# Altium PCB GPS_Altimetro_BoosterPack.PcbDoc
Units mm, origin at the board's own origin, x right, y up, seen from the top; angles counter-clockwise.
Board outline 55 x 105 mm, 2 copper layers (Top Layer, Bottom Layer); 17 components, 23 nets, 107 pads, 4 vias.
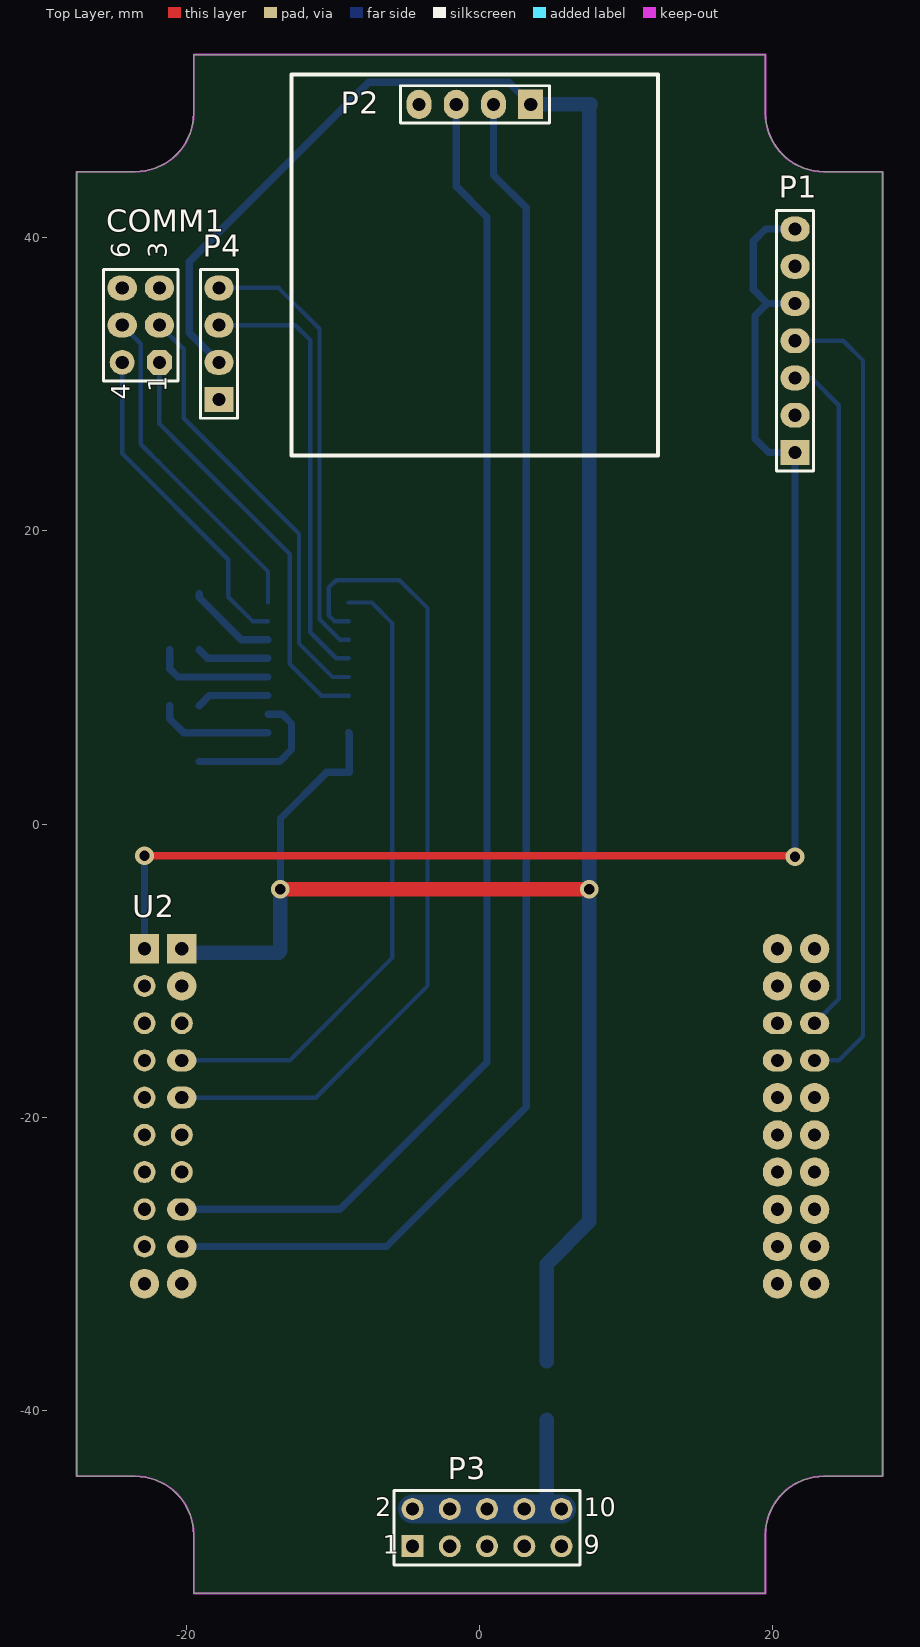
[diagram p0: Top Layer view]
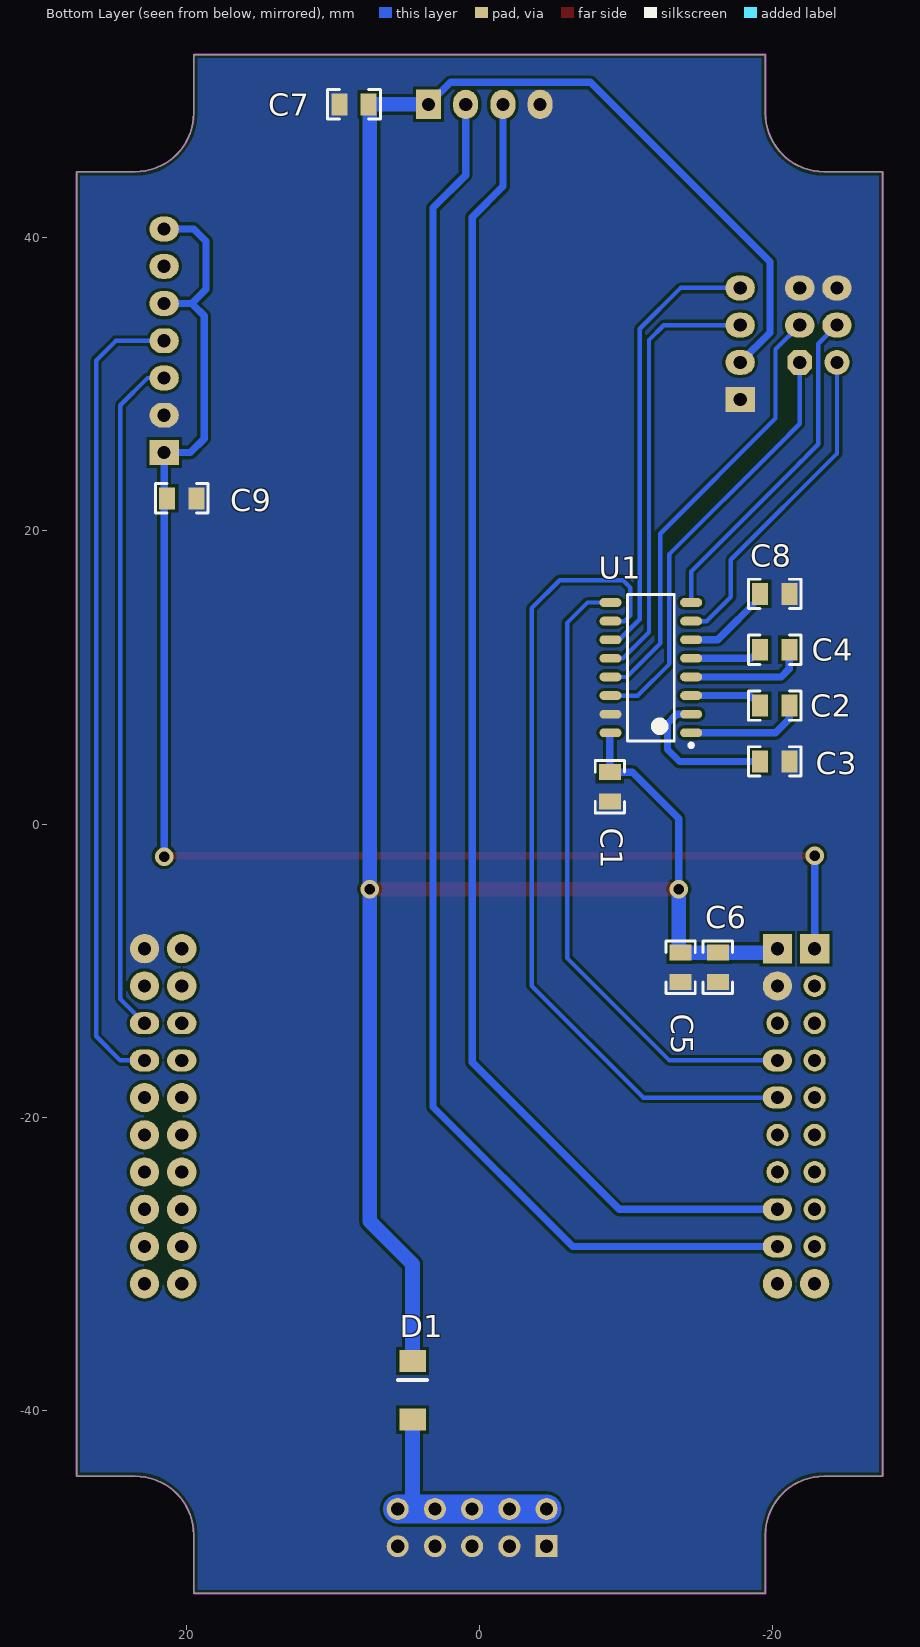
[diagram p1: Bottom Layer view, seen from below]

## Layer stack, top to bottom
Top Layer: signal copper 0.0356
Dielectric: dielectric 0.32, FR-4, Dk 4.8
Bottom Layer: signal copper 0.0356

## Board outline
-19.5,48.5 -19.561,47.805 -19.741,47.132 -20.036,46.5 -20.436,45.929 -20.929,45.436 -21.5,45.036 -22.132,44.741 -22.805,44.561 -23.5,44.5 -27.5,44.5 -27.5,-44.5 -23.5,-44.5 -22.805,-44.561 -22.132,-44.741 -21.5,-45.036 -20.929,-45.436 -20.436,-45.929 -20.036,-46.5 -19.741,-47.132 -19.561,-47.805 -19.5,-48.5 -19.5,-52.5 19.5,-52.5 19.5,-48.5 19.561,-47.805 19.741,-47.132 20.036,-46.5 20.436,-45.929 20.929,-45.436 21.5,-45.036 22.132,-44.741 22.805,-44.561 23.5,-44.5 27.5,-44.5 27.5,44.5 23.5,44.5 22.805,44.561 22.132,44.741 21.5,45.036 20.929,45.436 20.436,45.929 20.036,46.5 19.741,47.132 19.561,47.805 19.5,48.5 19.5,52.5 -19.5,52.5

## Design rules (kind name [scope] priority, off if disabled: settings)
Clearance [All] p1: gap=0.2
PolygonConnect [All] p1: connectstyle=Direct reliefconductorwidth=0.254 reliefentries=4 polygonreliefangle="90 Angle"
RoutingVias [All] p1: holewidth=0.8 width=2 viastyle="Through Hole" minholewidth=0.711 minwidth=1.27 maxholewidth=2 maxwidth=3
SilkscreenOverComponentPads [All] p1: minsilkscreentomaskgap=0.254
SolderMaskExpansion [All] p1: expansion=0.102
Width [All] p1: maxlimit=3 minlimit=0.3 preferedwidth=0.5
27 further rules are at their usual default settings.

## Components (designator, comment, footprint, x,y, rotation, side; value= is the part's Value field where it differs from the comment)
C1 "Capacitor" 0805_CAP -8.89,2.54 r90 bottom
C2 "Capacitor" 0805_CAP -20.134,8.079 r0 bottom
C3 "Capacitor" 0805_CAP -20.134,4.269 r0 bottom
C4 "Capacitor" 0805_CAP -20.134,11.889 r180 bottom
C5 "Capacitor" 0805_CAP -13.716,-9.779 r270 bottom
C6 "Capacitor" 0805_CAP -16.256,-9.779 r270 bottom
C7 "Capacitor" 0805_CAP 8.568,49.1 r0 bottom
C8 "Capacitor" 0805_CAP -20.134,15.699 r0 bottom
C9 "Capacitor" 0805_CAP 20.32,22.225 r180 bottom
COMM1 "AP_COMM" HDR2X3_CEN -21.844,31.496 r90 top
D1 "1N4148" 1N4148SMD 4.572,-40.64 r90 bottom
P1 "Header 7" HDR1X7 21.522,25.351 r90 top
P2 "Header 4" HDR1X4 3.488,49.1 r180 top
P3 "Header 5X2" HDR2X5 -4.572,-49.276 r0 top
P4 "Header 4" HDR1X4 -17.78,28.956 r90 top
U1 "MAX3232ESE" SOIC127P602-16BN -11.684,10.668 r0 bottom
U2 "Stellaris LaunchPad Board" LAUNCHPAD 0,-19.939 r0 top

## Footprints (in the part's own frame and the unit in brackets; to place one, negate y for a bottom-side part, rotate by r counter-clockwise, add the part's x,y. Pads: shape width x height; smd on the part's side, far side on the other; paste and mask are expansions set on the pad)
1N4148SMD [mm]
  rect 1.5x1.8 smd: 1(0,0) 2(4,0)
  silkscreen extent 2.7,-1 2.7,1
0805_CAP [mm]
  rect 1.1x1.5 smd: 1(-1,0) 2(1,0)
  silkscreen extent -1.8,-1 1.8,1, body extent -1,-0.62 1,0.63, height 0.78
HDR1X4 [mm] "Connector; Header; 4 Position"
  rect 1.7x2 hole 0.9: 1(0,0)
  oval 1.7x2 hole 0.9: 2(2.54,0) 3(5.08,0) 4(7.62,0)
  silkscreen extent -1.27,-1.27 8.89,1.27
HDR1X7 [mm] "Connector; Header; 7 Position"
  rect 1.7x2 hole 0.9: 1(0,0)
  oval 1.7x2 hole 0.9: 2(2.54,0) 3(5.08,0) 4(7.62,0) 5(10.16,0) 6(12.7,0) 7(15.24,0)
  silkscreen extent -1.27,-1.27 16.51,1.27
HDR2X3_CEN [mm] "Connector; Header; 3x2 Position"
  oct 1.7x1.7 hole 0.9: 1(0,0)
  oval 1.7x2 hole 0.9: 2(2.54,0) 3(5.08,0) 5(2.54,2.54) 6(5.08,2.54)
  round 1.7 hole 0.9: 4(0,2.54)
  silkscreen extent -1.27,-1.27 6.35,3.81, body extent -1.27,-1.27 6.33,3.81, height 8.55
HDR2X5 [mm] "Connector; Header; 5x2 Position"
  rect 1.5x1.5 hole 0.9: 1(0,0)
  round 1.5 hole 0.9: 2(0,2.54) 3(2.54,0) 4(2.54,2.54) 5(5.08,0) 6(5.08,2.54) 7(7.62,0) 8(7.62,2.54) 9(10.16,0) 10(10.16,2.54)
  silkscreen extent -1.27,-1.27 11.43,3.81
LAUNCHPAD [mm]
  rect 2x2 hole 0.9: 1(-22.86,11.43) 21(-20.32,11.43)
  round 1.5 hole 0.9: 2(-22.86,8.89) 3(-22.86,6.35) 4(-22.86,3.81) 5(-22.86,1.27) 6(-22.86,-1.27) 7(-22.86,-3.81) 8(-22.86,-6.35) 9(-22.86,-8.89) 23(-20.32,6.35) 26(-20.32,-1.27) 27(-20.32,-3.81)
  round 2 hole 0.9: 10(-22.86,-11.43) 11(22.86,11.43) 12(22.86,8.89) 15(22.86,1.27) 16(22.86,-1.27) 17(22.86,-3.81) 18(22.86,-6.35) 19(22.86,-8.89) 20(22.86,-11.43) 22(-20.32,8.89) 30(-20.32,-11.43) 31(20.32,11.43) 32(20.32,8.89) 35(20.32,1.27) 36(20.32,-1.27) 37(20.32,-3.81) 38(20.32,-6.35) 39(20.32,-8.89) 40(20.32,-11.43)
  oval 2x1.5 hole 0.9: 13(22.86,6.35) 14(22.86,3.81) 24(-20.32,3.81) 25(-20.32,1.27) 28(-20.32,-6.35) 29(-20.32,-8.89) 33(20.32,6.35) 34(20.32,3.81)
SOIC127P602-16BN [mm] "SOIC, 16-Leads, Body 9.9x3.9mm, Pitch 1.27mm, IPC Medium Density"
  oval 1.5x0.6 smd: 1(-2.75,4.445) 2(-2.75,3.175) 3(-2.75,1.905) 4(-2.75,0.635) 5(-2.75,-0.635) 6(-2.75,-1.905) 7(-2.75,-3.175) 8(-2.75,-4.445) 9(2.75,-4.445) 10(2.75,-3.175) 11(2.75,-1.905) 12(2.75,-0.635) 13(2.75,0.635) 14(2.75,1.905) 15(2.75,3.175) 16(2.75,4.445)
  silkscreen extent -2.87,-5 1.6,5.42, body extent -3,-5.1 3,5.1, height 1.7

## Part data
C1 C2 C3 C4 C5 C6 C7 C8 C9: library part Cap
COMM1: "Header, 3-Pin, Dual row"
P1: "Header, 7-Pin"
P2 P4: "Header, 4-Pin"
P3: "Header, 5-Pin, Dual row"
U1: library part MAX3232ESE+
U2: "Stellaris LaunchPad board"

## Via types
v1: diameter 1.27, hole 0.711, Top Layer to Bottom Layer, 4 vias

## Nets (pads, with @x,y where several pads share a name; then routed paths per layer and width w, separated by ;. In a path a pad name is that pad's centre, name@x,y a point inside that pad or via, vN(x,y) a via of type N, cw(c..) or ccw(c..) an arc to the next point about the centre after c; other vN are vias at no path point)
3.3V: C9.1 P1.1 P1.5 P1.7 U2.1 | length 100.8
  Top Layer w0.5: v1(-22.86,-2.159) 21.454,-2.159 v1(21.522,-2.227)
  Bottom Layer w0.5: U2.1 v1(-22.86,-2.159) ; P1.1@21.463,25.292 P1.1 ; v1(21.522,-2.227) P1.1 ; P1.5 19.636,35.511 ; P1.7 19.509,40.591 18.669,39.751 18.669,36.478 19.636,35.511 ; 19.636,35.511 18.796,34.671 18.796,26.289 19.734,25.351 P1.1
5V: C1.2 C5.1 C6.1 C7.1 D1.2 P2.1 P4.2 U1.16 U2.21 | length 176.1
  Top Layer w1: v1(-13.589,-4.445) v1(7.493,-4.445)
  Bottom Layer w0.5: P4.2 -19.812,33.528 -19.812,38.354 -7.566,50.6 1.988,50.6 P2.1 ; v1(-13.589,-4.445) -13.589,-2.286 ; -13.589,-1.27 -13.589,-2.286 ; U1.16 -8.89,6.179 C1.2 -10.43,3.54 -13.589,0.381 -13.589,-2.286
  Bottom Layer w1: U2.21 -20.05,-8.779 C6.1 C5.1 -13.589,-8.652 v1(-13.589,-4.445) ; P2.1 C7.1 7.493,49.025 7.493,-1.143 ; D1.2 4.572,-30.036 7.493,-27.115 v1(7.493,-4.445) 7.493,-1.143 ; 7.493,-2.794 7.493,-1.143
ALT_SCL: P1.3 U2.13 | length 46.9
  Bottom Layer w0.3: P1.3 22.655,30.431 24.511,28.575 24.511,-10.033 ; U2.13 24.511,-11.938 24.511,-10.033 ; 24.511,-10.287 24.511,-10.033
ALT_SDA: P1.4 U2.14 | length 60.1
  Bottom Layer w0.3: P1.4 24.814,32.971 26.162,31.623 26.162,27.305 ; U2.14 24.511,-16.129 26.162,-14.478 26.162,-11.938 ; 26.162,-12.827 26.162,-11.938 ; 26.162,31.242 26.162,27.305 ; 26.162,-11.938 26.162,27.305
ALT_SDO: P1.6
GND: C1.1 C3.1 C5.2 C6.2 C7.2 C8.1 C9.2 COMM1.3 COMM1.6 P1.2 P2.4 P3.1 P3.3 P3.5 P3.7 P3.9 P4.1 U1.15 U2.11 U2.22
GPS_RX: P2.2 U2.29 | length 96.8
  Bottom Layer w0.5: U2.29 -6.35,-28.829 3.175,-19.304 3.175,42.037 0.948,44.264 P2.2
GPS_TX: P2.3 U2.28 | length 92.1
  Bottom Layer w0.5: U2.28 -9.525,-26.289 0.508,-16.256 0.508,-13.716 ; P2.3 -1.592,43.502 0.508,41.402 0.508,-13.716 ; 0.508,-14.605 0.508,-13.716
NetC2_1: C2.1 U1.1 | length 8
  Bottom Layer w0.5: C2.1 -21.134,7.164 -20.193,6.223 U1.1
NetC2_2: C2.2 U1.3 | length 5
  Bottom Layer w0.5: C2.2 -18.45,8.763 U1.3
NetC3_2: C3.2 U1.2 | length 10.3
  Bottom Layer w0.5: C3.2 -13.638,4.269 -12.827,5.08 -12.827,6.858 -13.462,7.493 U1.2
NetC4_1: C4.1 U1.5 | length 4.9
  Bottom Layer w0.5: C4.1 -18.548,11.303 U1.5
NetC4_2: C4.2 U1.4 | length 8.2
  Bottom Layer w0.5: C4.2 -21.134,10.593 -20.574,10.033 U1.4
NetC8_2: C8.2 U1.6 | length 6.1
  Bottom Layer w0.5: C8.2 -19.134,15.451 -16.256,12.573 U1.6
NetD1_1: D1.1 P3.2 P3.4 P3.6 P3.8 P3.10 | length 16.3
  Bottom Layer w1: 4.572,-46.736 D1.1
  Bottom Layer w2: P3.2 P3.4 P3.6 P3.8 4.572,-46.736 P3.10
RXD1: P4.3 U1.12 | length 29.9
  Bottom Layer w0.3: P4.3 -12.573,34.036 -11.557,33.02 -11.557,13.081 -9.779,11.303 U1.12
RXD2: U1.9 U2.24 | length 44.3
  Bottom Layer w0.3: U2.24 -12.954,-16.129 -5.969,-9.144 -5.969,-6.858 ; U1.9 -7.366,15.113 -5.969,13.716 -5.969,-6.858 ; -5.969,-7.493 -5.969,-6.858
TXD1: P4.4 U1.11 | length 30.4
  Bottom Layer w0.3: P4.4 -13.716,36.576 -10.922,33.782 -10.922,13.97 -9.525,12.573 U1.11
TXD2: U1.10 U2.25 | length 57.5
  Bottom Layer w0.3: U2.25 -11.176,-18.669 -3.556,-11.049 -3.556,-8.763 ; U1.10 -9.906,13.843 -10.287,14.224 -10.287,16.129 -9.779,16.637 -5.461,16.637 -3.556,14.732 -3.556,-8.763 ; -3.556,-9.398 -3.556,-8.763
URXD1: COMM1.2 U1.13 | length 30
  Bottom Layer w0.3: COMM1.2 -20.193,32.385 -20.193,27.686 -12.319,19.812 -12.319,12.319 -10.033,10.033 U1.13
URXD2: COMM1.5 U1.8 | length 23.8
  Bottom Layer w0.3: COMM1.5 -23.114,32.766 -23.114,25.908 -21.463,24.257 ; -21.982,24.776 -21.463,24.257 ; U1.8 -14.434,17.228 -21.463,24.257
UTXD1: COMM1.1 U1.14 | length 29.6
  Bottom Layer w0.3: COMM1.1 -21.844,27.305 -20.32,25.781 ; -20.642,26.103 -20.32,25.781 ; U1.14 -10.795,8.763 -12.954,10.922 -12.954,18.415 -20.32,25.781
UTXD2: COMM1.4 U1.7 | length 22.4
  Bottom Layer w0.3: COMM1.4 -24.384,25.273 -17.145,18.034 -17.145,15.494 -15.494,13.843 U1.7
pads on no net: U2.2 U2.3 U2.4 U2.5 U2.6 U2.7 U2.8 U2.9 U2.10 U2.12 U2.15 U2.16 U2.17 U2.18 U2.19 U2.20 U2.23 U2.26 U2.27 U2.30 U2.31 U2.32 U2.33 U2.34 U2.35 U2.36 U2.37 U2.38 U2.39 U2.40

## Polygon pours and split planes (outlines as drawn)
GND on Bottom Layer "BottomGND" (solid, remove dead copper, pour order 1000): -29.718,-55.245 -29.718,54.229 -29.464,54.483 -29.083,54.864 32.131,54.864 32.131,-51.689 29.21,-54.61

## Keep-outs
Keep-Out Layer:
  lines w0.127: -27.5,-44.5 -27.5,44.5 -23.5,44.5 ccw(c-23.5,48.5) -19.5,48.5 -19.5,52.5 19.5,52.5 19.5,48.5 ccw(c23.5,48.5) 23.5,44.5 27.5,44.5 27.5,-44.5 23.5,-44.5 ccw(c23.5,-48.5) 19.5,-48.5 19.5,-52.5 -19.5,-52.5 -19.5,-48.5 ccw(c-23.5,-48.5) -23.5,-44.5 -27.5,-44.5

## Silkscreen, mask and mechanical layers (free items; w line width, h text height)
Top Overlay:
  lines w0.254: -12.827,25.146 12.173,25.146 12.173,51.132 -12.827,51.132 -12.827,25.146

## Text inside footprints (layer, text, board x,y; h text height)
COMM1: Top Overlay "4" at -23.876,28.956 h1.27 r90; Top Overlay "1" at -21.336,29.464 h1.27 r90; Top Overlay "3" at -21.336,38.608 h1.27 r90; Top Overlay "6" at -23.876,38.608 h1.27 r90
P3: Top Overlay "10" at 7.112,-47.244 h1.27; Top Overlay "9" at 7.112,-49.784 h1.27; Top Overlay "1" at -6.604,-49.784 h1.27; Top Overlay "2" at -7.112,-47.244 h1.27